# EAGLE board Steering (EAGLE 9.5.1)
AUTHORS: Austin Keener; REV: 1.0; TITLE: LIDAR_BREAKOUT
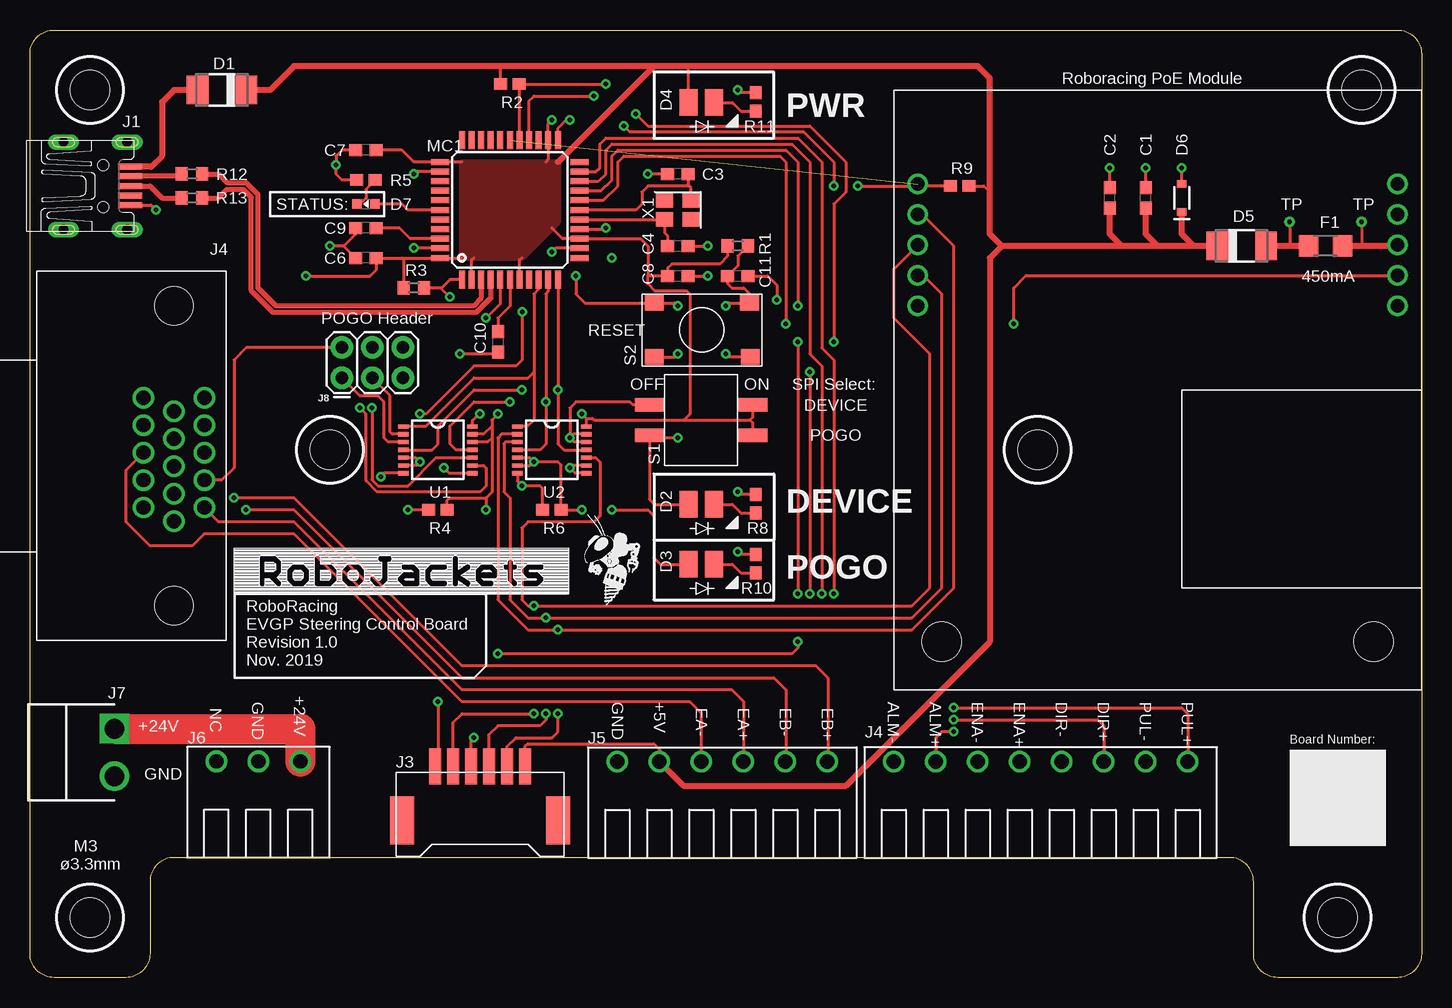
[diagram p0: board, top side]
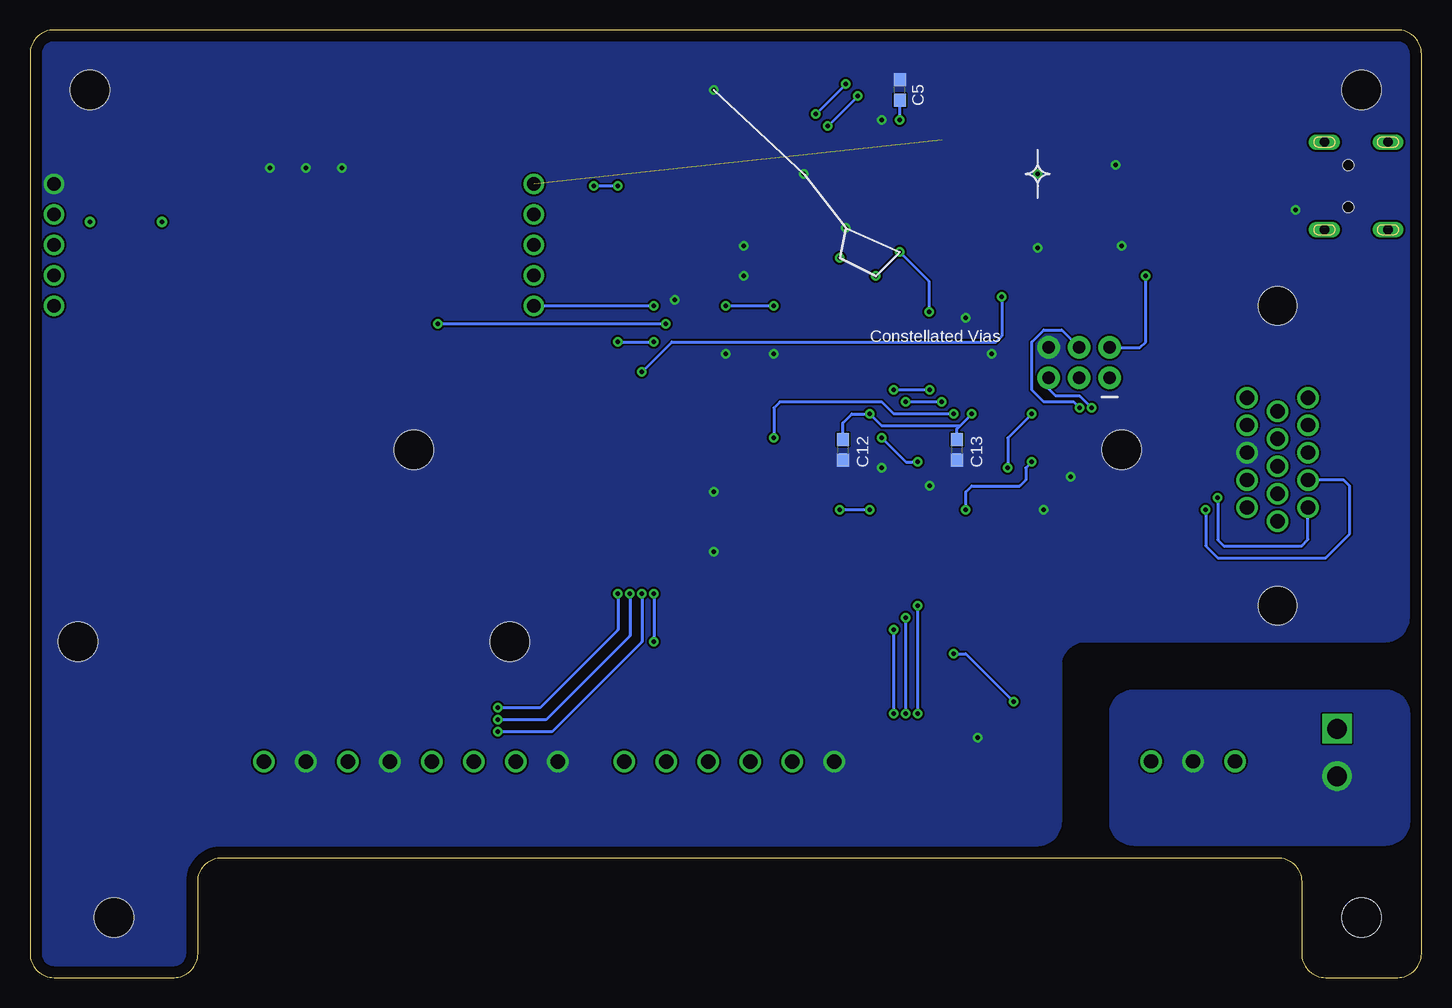
[diagram p1: board, bottom side, seen from below]

Size 116 x 79 mm. Coordinates in mm from the lower left corner, seen from the top.
Outline: 12,10 arc90 10,8 10,2 arc-90 8,0 2,0 arc-90 0,2 0,77 arc-90 2,79 114,79 arc-90 116,77 116,2 arc-90 114,0 104,0 arc-90 102,2 102,8 arc90 100,10 12,10
Copper layers (1*16): Top 0.0356mm / dielectric 63mil / Bottom 0.0356mm
Design rules "RJ2LayerDRU *": minimum track width 6mil, minimum drill 15mil, track to track 6mil, track to pad 6mil, pad to pad 6mil, via to via 6mil, smd to smd 6mil, copper to edge 0mil, drill to drill 6mil, minimum pad ring 10mil, minimum via ring 8mil, stop-mask expansion 4mil, vias tented up to drill 0mil, thermal gap 0mil
Net classes: 0 default: width 0.203 mm; 2 diff: width 0.406 mm
Holes 3.3 mm at 5,5 109,5 111,74 25,44 84,44 5,74

## Footprints (pad centres in the part's own frame; a part is rotated, then mirrored left to right if it is on the bottom)
C0603 = smd 1.1 x 1: 1 -0.85,0; 2 0.85,0
DO-214AC = smd 1.8 x 2.4: A 2.025,0; C -2.025,0
KINGBRIGHT_LED = smd 1.5 x 2.2: P$1 -1.016,0.048; P$2 1.084,0.048
SOD-323 = smd 0.63 x 0.83: A 1.15,0; C -1.15,0
CHIP-LED0603 = smd 0.8 x 0.8: A 0,-0.75; C 0,0.75
F1206 = smd 1.6 x 1.803: 1 -1.422,0; 2 1.422,0
UX60-MB-5S8 = smd 2 x 0.5: 1 8.65,1.6; 2 8.65,0.8; 3 8.65,0; 4 8.65,-0.8; 5 8.65,-1.6 | drill 0.8 long: M1 3.1,-3.65; M2 3.1,3.65; M3 8.4,3.65; M4 8.4,-3.65 | hole 0.9: 6.4,-1.75; 6.4,1.75
MOLEX_5025850670 = smd 1 x 3: 1 3.75,3.5; 2 2.25,3.5; 3 0.75,3.5; 4 -0.75,3.5; 5 -2.25,3.5; 6 -3.75,3.5 | smd 2 x 4: 7 6.5,-1; 8 -6.5,-1
SCREW_TERMINAL_PCB_CONN_8_POLE = drill 1.2: 1 0,0; 2 3.5,0; 3 7,0; 4 10.5,0; 5 14,0; 6 17.5,0; 7 21,0; 8 24.5,0
SCREW_TERMINAL_PCB_CONN_6_POLE = drill 1.2: 1 0,0; 2 3.5,0; 3 7,0; 4 10.5,0; 5 14,0; 6 17.5,0
SCREW_TERMINAL_PCB_CONN_3_POLE = drill 1.2: 1 -3.5,0; 2 0,0; 3 3.5,0
B2PS-CENTERED = drill 1.65 square: 1 -1.98,0 | drill 1.65: 2 1.98,0
2X3 = drill 1.016 pad 1.88: 1 0,0; 2 0,2.54; 3 2.54,0; 4 2.54,2.54; 5 5.08,0; 6 5.08,2.54
TE_VGA_2311586-5 = drill 1.19: 1 -8.185,2.54; 2 -10.475,2.54; 3 -12.765,2.54; 4 -15.055,2.54; 5 -17.345,2.54; 6 -7.04,0; 7 -9.33,0; 8 -11.62,0; 9 -13.91,0; 10 -16.2,0; 11 -8.185,-2.54; 12 -10.475,-2.54; 13 -12.765,-2.54; 14 -15.055,-2.54; 15 -17.345,-2.54 | hole 3.18: 0,0; -25,0
TQFP44 = smd 1.5 x 0.5: 1 -5.8,4; 2 -5.8,3.2; 3 -5.8,2.4; 4 -5.8,1.6; 5 -5.8,0.8; 6 -5.8,0; 7 -5.8,-0.8; 8 -5.8,-1.6; 9 -5.8,-2.4; 10 -5.8,-3.2; 11 -5.8,-4; 23 5.8,-4; 24 5.8,-3.2; 25 5.8,-2.4; 26 5.8,-1.6; 27 5.8,-0.8; 28 5.8,0; 29 5.8,0.8; 30 5.8,1.6; 31 5.8,2.4; 32 5.8,3.2; 33 5.8,4 | smd 0.5 x 1.5: 12 -4,-5.8; 13 -3.2,-5.8; 14 -2.4,-5.8; 15 -1.6,-5.8; 16 -0.8,-5.8; 17 0,-5.8; 18 0.8,-5.8; 19 1.6,-5.8; 20 2.4,-5.8; 21 3.2,-5.8; 22 4,-5.8; 34 4,5.8; 35 3.2,5.8; 36 2.4,5.8; 37 1.6,5.8; 38 0.8,5.8; 39 0,5.8; 40 -0.8,5.8; 41 -1.6,5.8; 42 -2.4,5.8; 43 -3.2,5.8; 44 -4,5.8
R0603 = smd 1 x 1.1: 1 -0.85,0; 2 0.85,0
R0603W = smd 1.09 x 0.94: 1 -0.775,0; 2 0.775,0
PTS645 = smd 1.55 x 1.3: P$1 -3.975,2.25; P$2 3.975,2.25; P$3 -3.975,-2.25; P$4 4.025,-2.25
CTS_DIP_SWITCH = smd 1.118 x 2.438: A1 -1.25,-4.361; A2 -1.25,4.25; B1 1.29,-4.361; B2 1.29,4.25
TP_15TH = drill 0.381 pad 0.61: P$1 0,0
TSSOP14 = smd 0.9 x 0.35: 1 -2.875,1.95; 2 -2.875,1.3; 3 -2.875,0.65; 4 -2.875,0; 5 -2.875,-0.65; 6 -2.875,-1.3; 7 -2.875,-1.95; 8 2.875,-1.95; 9 2.875,-1.3; 10 2.875,-0.65; 11 2.875,0; 12 2.875,0.65; 13 2.875,1.3; 14 2.875,1.95
HDRVR10W64P4000X254_2X5_1016X508X254B = drill 1.105 pad 1.705: 1 2,18; 2 2,15.46; 3 2,12.92; 4 2,10.38; 5 2,7.84; 6 42,7.84; 7 42,10.38; 8 42,12.92; 9 42,15.46; 10 42,18 | hole 3.3: 4,46; 40,46
XTAL-3.2X2.5 = smd 1.4 x 1.2: 1 -1.1,-0.8; 2 1.1,-0.8; 3 1.1,0.8; 4 -1.1,0.8

## Placement (x,y rotation side)
C1  0.1 uF  [C0603]  93,65 90 top
C2  1 uF  [C0603]  90,65 90 top
C3  9 pF  [C0603]  54,67 180 top
C4  9 pF  [C0603]  54,61 0 top
C5  0.1 uF  [C0603]  43.5,74 90 bottom
C6  0.1 uF  [C0603]  28,60 180 top
C7  0.1 uF  [C0603]  28,69 180 top
C8  0.1 uF  [C0603]  54,58.5 0 top
C9  10 nF  [C0603]  28,62.5 180 top
C10  1 uF  [C0603]  39,53 270 top
C11  0.1 uF  [C0603]  59,58.5 0 top
C12  0.1 uF  [C0603]  48.25,44 270 bottom
C13  0.1 uF  [C0603]  38.75,44 270 bottom
D1  APD340VRTR-G1  [DO-214AC]  16,74 180 top
D2  LED_AA3528VRVCS/A  [KINGBRIGHT_LED]  56,39.5 180 top
D3  LED_AA3528VRVCS/A  [KINGBRIGHT_LED]  56,34.5 180 top
D4  PINK  [KINGBRIGHT_LED]  56,73 180 top
D5  APD340VRTR-G1  [DO-214AC]  101,61 0 top
D6  5.1V  [SOD-323]  96,65 90 top
D7  BLUE  [CHIP-LED0603]  28,64.5 90 top
F1  FUSE1206  [F1206]  108,61 0 top
J1  UX60-MB-5S8  [UX60-MB-5S8]  -0.3,66 0 top
J2  MOLEX_5025850670  [MOLEX_5025850670]  37.54,14.12 0 top
J4  PCB_SCREW_TERM_8  [SCREW_TERMINAL_PCB_CONN_8_POLE]  72,18 0 top
J5  PCB_SCREW_TERM_6  [SCREW_TERMINAL_PCB_CONN_6_POLE]  48.96,18 0 top
J6  PCB_SCREW_TERM_3  [SCREW_TERMINAL_PCB_CONN_3_POLE]  19.04,18.02 0 top
J7  B2PS-VH(LF)(SN)  [B2PS-CENTERED]  7.04,18.76 270 top
J8  AVR_SPI_PROG_3X2PTH  [2X3]  26,50 0 top
J9  TE_2311586-5_VGA_CONNECTOR  [TE_VGA_2311586-5]  12,31 270 top
MC1  ATMEGA32U4-AU  [TQFP44]  40,64 90 top
R1  10 KΩ  [R0603]  59,61 0 top
R2  10KΩ  [R0603W]  40,74.5 180 top
R3  10 KΩ  [R0603]  32,57.5 180 top
R4  10KΩ  [R0603W]  34,39 0 top
R5  200Ω  [R0603W]  28,66.5 180 top
R6  10KΩ  [R0603W]  43.5,39 0 top
R8  100Ω  [R0603W]  60.5,39.5 270 top
R9  10KΩ  [R0603W]  77.5,66 0 top
R10  100Ω  [R0603W]  60.5,34.5 270 top
R11  100Ω  [R0603W]  60.5,73 270 top
R12  22 Ω  [R0603]  13.5,67 180 top
R13  22 Ω  [R0603]  13.5,65 180 top
RESET_BUTTON  PTS645  [PTS645]  56,54 0 top
S1  CTS_SWITCH_SPST  [CTS_DIP_SWITCH]  56,46.5 270 top
TP1  TEST-POINTTP_15TH_THRU  [TP_15TH]  105,63 0 top
TP2  TEST-POINTTP_15TH_THRU  [TP_15TH]  111,63 0 top
U1  CD4066BPWR  [TSSOP14]  34,44 0 top
U2  CD4066BPWR  [TSSOP14]  43.5,44 0 top
U3  ETH-POE  [HDRVR10W64P4000X254_2X5_1016X508X254B]  116,74 180 top
U$4  [ROBOJACKETS]  17,32 0 top
U$5  [ROBOBUZZ_0.4X]  48,31 0 top
X1  TSX-3225 16.0000MF18X-AC0  [XTAL-3.2X2.5]  54,64 180 top

## Library data of the parts
C1-C13 = resistor
D1 D5 = RoboJackets-Diodes
D2-D4 = Steering; DKPN: 754-1534-1-ND
D6 = SparkFun-DiscreteSemi; PROD_ID: DIO-11284
D7 = RoboJackets-LEDs; DIGIKEY: 160-1647-1-ND; MPN: LTST-C191TBKT
F1 = RoboJackets-Passive
J1 = RoboJackets-Connectors; PINS: 5
J2 = Steering
J4 = Steering; DKPT: 732-2774-ND
J5 = Steering; DKPT: 732-2773-ND
J6 = Steering; DKPT: 732-2770-ND
J7 = RoboJackets-Connectors; DIGIKEY: 455-1648-ND; MPN: B2PS-VH(LF)(SN)
J8 TP1 TP2 = SparkFun-Connectors
J9 = Steering; DKPN: A144832-ND
MC1 = adafruit
R1 R3 R12 R13 = rcl; SPICEPREFIX: R
R2 R4-R6 R8-R11 = RoboJackets-Resistors
RESET_BUTTON = RoboJackets-Switches
S1 = Steering; DKPT: CT3113CT-ND
U1 U2 = Steering; DKPN: 296-14123-1-ND
U3 = ethernet_poe
U$4 U$5 = RoboJackets-Aesthetics
X1 = RoboJackets-FreqGen

## Nets
5V_MC: C1.1 C2.1 C5.1 C6.1 C7.1 C8.1 C12.1 C13.1 D1.C D4.P$2 D5.C D6.C J2.1 J5.2 J8.2 J9.2 MC1.2 MC1.7 MC1.14 MC1.24 MC1.34 MC1.44 R1.1 R2.2 R3.2 R9.2 S1.A2 S1.B2 U1.14 U2.14
+24V_STEPPER: J6.3 J7.1
AREF: C9.1 MC1.42
CS_ENCODER: J2.6 MC1.27 R2.1
CS_ETH: MC1.26
DATA_N [diff]: MC1.3 R12.1
DATA_P [diff]: MC1.4 R13.1
DEVICE_SWITCH: D3.P$2 R6.2 S1.A1 U2.5 U2.6 U2.12 U2.13
DIR+: J4.6 MC1.20
EA+: J5.4 J9.1
EA-: J5.3 J9.13
EB+: J5.6 J9.11
EB-: J5.5 J9.12
ETH_INT: MC1.19 U3.10
GND: C1.2 C2.2 C3.2 C4.2 C5.2 C6.2 C7.2 C8.2 C9.2 C10.2 C11.2 C12.2 C13.2 D6.A J1.5 J2.4 J4.1 J4.5 J4.7 J5.1 J8.6 J9.3 MC1.5 MC1.15 MC1.23 MC1.35 MC1.43 R4.1 R5.2 R6.1 R8.1 R10.1 R11.1 RESET_BUTTON.P$3 RESET_BUTTON.P$4 U1.7 U2.7 U2.8 U2.9 U3.5
GND_STEPPER: J6.2 J7.2
MISO: MC1.11 U1.4 U2.11
MISO_DEVICE: J2.5 U2.10 U3.8
MISO_POGO: J8.1 U1.3
MOSI: MC1.10 U1.11 U2.4
MOSI_DEVICE: J2.3 U2.3 U3.9
MOSI_POGO: J8.4 U1.10
N$1: D1.A J1.1
N$2: D7.A MC1.39
N$3: D7.C R5.1
N$4: D3.P$1 R10.2
N$6: D2.P$1 R8.2
N$8: J1.2 R12.2
N$9: F1.2 TP2.P$1 U3.3
N$10: D4.P$1 R11.2
N$12: D5.A F1.1 TP1.P$1
N$23: J1.3 R13.2
POGO_SWITCH: D2.P$2 R4.2 S1.B1 U1.5 U1.6 U1.12 U1.13
PUL+: J4.8 MC1.21
RST_MC: C11.1 MC1.13 R1.2 RESET_BUTTON.P$1 RESET_BUTTON.P$2 U1.8
RST_MC_POGO: J8.5 U1.9
RST_NET: MC1.18 U3.2
SCLK: MC1.9 U1.1 U2.1
SCLK_DEVICE: J2.2 U2.2 U3.7
SCLK_POGO: J8.3 U1.2
SCNN: MC1.28 R9.1 U3.6
STEPPER_ALARM: J4.2 MC1.1 R3.1
UCAP: C10.1 MC1.6
XTAL1: C3.1 MC1.17 X1.1
XTAL2: C4.1 MC1.16 X1.3

## Tracks (layer width: path | path; a pad name or v marks a point on that pad's centre or on a via)
5V_MC  (via drill 0.38)
  Top 0.254: 31,60 C6.1 28.85,59 28.35,58.5 v23,58.5 | 31,60 MC1.44 36,60 | R9.2 79.5,66 80,65.5 | 43,68 43.2,68.2 MC1.24 43.2,71.2 v43.5,71.5 | 43.5,62.5 44.4,61.6 MC1.14 50.9,61.6 51.5,61 51.5,58.5 | MC1.7 40.8,59.8 41,60 | MC1.2 36.8,59.8 37,60 | 36,68 MC1.34 32,68 31,69 C7.1 | J2.1 41.29,19.29 41.5,19.5 52,19.5 52.46,19.04 J5.2 | 51.5,58.5 C8.1 53.15,59.15 53.5,59.5 57.5,59.5 58.15,60.15 R1.1 | U1.14 36.88,46.45 37.42,47 v37.5,47 | v46,47 46.38,46.62 | U2.14 46.38,46.62 | 46.38,46.62 46.88,46.62 47,46.5 54.5,46.5 | 54.5,46.5 60,46.5 | S1.A2 60.25,46.75 60,46.5 | S1.B2 60.25,46.25 60,46.5 | 51.5,58.5 51.5,57.85 52.1,57.25 54.75,57.25 55,57 55,47 54.5,46.5 | D4.P$2 54.92,75.92 55,76 | 31,60 31.15,59.85 R3.2 | R2.2 39.23,75.72 39.5,76 | J8.2 18.04,52.54 17,51.5 17,42.5 15.97,41.48 J9.2
  Top 0.508: 97,61 94,61 | 94,61 93,62 C1.1 | 91,61 90,62 C2.1 | 81,61 80,62 80,65.5 80,75 79,76 55,76 52,76 | 52,76 39.5,76 22,76 20,74 D1.C | 94,61 91,61 | 91,61 81,61 | 97,61 96,62 D6.C | 52,76 44,68 | 81,61 80,60 80,28 68,16 54.46,16 J5.2 | D5.C 97,61
  Bottom 0.254: v23,58.5 23,53 23.46,52.54 J8.2 | v37.5,47 38.5,46 | 38.5,46 45,46 v46,47 47.5,47 48.25,46.25 C12.1 | C13.1 38.75,45.75 38.5,46 | v43.5,71.5 C5.1
  pour Top: 36,68 44,68 44,63 41,60 36,60
+24V_STEPPER
  Top 2.5: J7.1 22.54,20.74 J6.3
AREF
  Top 0.254: MC1.42 31.7,61.6 30.8,62.5 C9.1
CS_ENCODER  (via drill 0.38)
  Top 0.254: v50.5,72 51.5,71 65,71 68,68 68,65.5 67,64.5 v67,53 | v64,53 v64,32 | v64,28 64,27.5 63.5,27 v39,27 | v34,23 34,17.83 J2.6 | MC1.27 40.8,74.47 R2.1 v48,74.5
  Bottom 0.254: v48,74.5 v50.5,72 | v67,53 v64,53 | v64,32 v64,28 | v39,27 38,27 v34,23
CS_ETH  (via drill 0.38)
  Top 0.254: v49.5,71 50,70.5 64.5,70.5 67,68 v67,66 | v69,66 73.84,66 | MC1.26 41.6,73.1 42,73.5 v47,73.5
  Bottom 0.254: v47,73.5 v49.5,71 | v67,66 v69,66
DATA_N
  Top 0.406: MC1.3 37.6,56.64 36.96,56 20.5,56 19,57.5 19,65.29 18.89,65.39 18.64,65.64 18.01,66.28 16.43,66.28 15.71,67 R12.1
DATA_P
  Top 0.406: MC1.4 38.4,56.64 37.2,55.44 20.27,55.44 18.44,57.27 18.44,65.06 18.25,65.25 17.78,65.72 16.43,65.72 15.71,65 R13.1
DEVICE_SWITCH  (via drill 0.38)
  Top 0.254: U2.13 45.3,45.3 v45,45 | U2.12 45.35,44.65 v45,45 | U2.5 41.65,43.35 v42,43 | v42,43 44,43 44.27,42.73 R6.2 v46,39 | S1.A1 50.25,47.75 50,48 45.5,48 45,47.5 v45,45 | D3.P$2 52.55,34.45 52,35 52,38.5 51.5,39 v48.5,39 | U2.6 41.7,42.7 v42,43
  Bottom 0.254: v45,45 43,43 v42,43 | v46,39 v48.5,39
DIR+  (via drill 0.38)
  Top 0.254: MC1.20 47.4,66.4 48,67 48,69 48.5,69.5 63.5,69.5 65,68 65,52 66,51 v66,32 | v77,21.5 89,21.5 89.5,21 J4.6
  Bottom 0.254: v66,32 66,28.5 73,21.5 v77,21.5
EA+
  Top 0.254: J5.4 59.5,18.04 59.5,23 58.5,24 36,24 22,38 15.72,38 J9.1
EA-
  Top 0.254: J5.3 55.96,22.04 55,23 36,23 22,37 14.5,37 13.5,36 10,36 8,38 8,42.3 J9.13
EB+  (via drill 0.38)
  Top 0.254: J5.6 66.5,18.04 66.5,25 65.5,26 36,26 22,40 v17,40
  Bottom 0.254: v17,40 17,36.5 16.5,36 10,36 9.46,36.54 J9.11
EB-  (via drill 0.38)
  Top 0.254: J5.5 63,18.04 63,24 62,25 36,25 22,39 v18,39
  Bottom 0.254: v18,39 18,36 17,35 8,35 6,37 6,41 6.5,41.5 9.44,41.5 J9.12
ETH_INT  (via drill 0.38)
  Top 0.254: MC1.19 47.6,65.6 48.5,66.5 48.5,68.5 49,69 63,69 64,68 v64,56
  Bottom 0.254: v64,56 U3.10
GND  (via drill 0.38)
  Top 0.254: C4.2 v56.5,61 | C3.2 v51.5,67 | 31.07,42 U1.7 29.55,42.05 v29.25,41.75 | U2.7 40.62,41.38 v41,41 42.5,41 42.73,40.77 R6.1 | R4.1 v31.5,39 | J2.4 36.79,19.79 v37,20 | D6.A v96,67.5 | 93.3,66.15 C1.2 v93,67.5 | C2.2 v90,67.5 | J1.5 10.1,64.4 v10.5,64 | RESET_BUTTON.P$3 53.75,51.75 v54,52 | RESET_BUTTON.P$4 58.25,51.75 v58,52 | 60.25,58.5 C11.2 61.5,58.5 62.25,57.75 v62.25,56.5 | C8.2 v56.5,58.5 | MC1.43 32.03,60.8 v32,60.83 | MC1.5 39.2,56.16 v38,55 | C10.2 38.85,52 v35.83,52 | MC1.23 44,70.8 44.7,71.5 v45,71.5 | MC1.35 32.2,67.2 v32,67 | MC1.15 47.9,62.4 v48,62.5 | R10.1 59.23,35.27 v59,35.5 | R8.1 59.23,40.27 v59,40.5 | R11.1 59.23,73.78 v59,74 | 46.33,42 U2.8 45.45,42.05 v45,42.5 45.2,42.7 U2.9 | C6.2 26.15,61 | 26.15,61 v25,61 | C9.2 27.15,62 26.15,61 | C7.2 26,69 25.5,68.5 v25.5,67.75 25.5,67 26,66.5 R5.2
  pour Bottom (no thermals): 1,77 arc-90 2,78 114,78 arc-90 115,77 115,2 arc-90 114,1 104,1 arc-90 103,2 103,8 arc90 100,11 32,11 arc-90 30,13 30,26 arc90 28,28 3,28 arc-90 1,30
GND_STEPPER
  pour Bottom (no thermals): 26,13 26,22 arc90 24,24 3,24 arc90 1,22 1,13 arc90 3,11 24,11 arc90
MISO  (via drill 0.38)
  Top 0.254: MC1.11 v44,49 44,44.5 44.5,44 U2.11 | U1.4 33.5,44 34,44.5 34,46 37,49 v41,49
  Bottom 0.254: v41,49 v44,49
MISO_DEVICE  (via drill 0.38)
  Top 0.254: U2.10 47.15,43.35 47.5,43 47.5,38.5 47,38 41.5,38 41,37.5 41,31.5 41.5,31 v42,31 73.5,31 75,32.5 75,52 72,55 72,59.08 U3.8 | J2.5 35.29,21.29 36,22 v42,22
  Bottom 0.254: v42,22 v42,31
MISO_POGO
  Top 0.254: U1.3 29.85,44.65 29.5,45 29.5,48 29,48.5 27.5,48.5 J8.1
MOSI  (via drill 0.38)
  Top 0.254: MC1.10 43.2,57.2 43,57 v43,48 43,44.5 42.5,44 U2.4 | U1.11 35.5,44 35,44.5 35,46 37,48 v40,48
  Bottom 0.254: v40,48 v43,48
MOSI_DEVICE  (via drill 0.38)
  Top 0.254: U2.3 39.65,44.65 39.5,44.5 39.5,40.5 40,40 40,31.5 41.5,30 v43,30 73.5,30 76,32.5 76,57 74.46,58.54 U3.9 | J2.3 38.29,20.29 39,21 42.5,21 43,21.5 v43,22
  Bottom 0.254: v43,22 v43,30
MOSI_POGO  (via drill 0.38)
  Top 0.254: v28.5,47.5 28.5,41.5 29,41 31.5,41 33.85,43.35 U1.10
  Bottom 0.254: v28.5,47.5 29,48 31.5,48 32.5,49 32.5,53 31.5,54 30,54 J8.4
N$1
  Top 0.508: D1.A 12,74 11,73 11,68.5 10.1,67.6 J1.1
N$2
  Top 0.254: MC1.39 31.5,64 31,64.5 D7.A
N$3
  Top 0.254: R5.1 28,65.72 28,65 27.5,64.5 D7.C
N$4
  Top 0.254: D3.P$1 58.55,34.45 59.27,33.73 R10.2
N$5  (via drill 0.38)
  other vias: 48.5,60
N$6
  Top 0.254: D2.P$1 58.55,39.45 59.27,38.73 R8.2
N$8
  Top 0.406: R12.2 12.45,66.8 J1.2
N$9
  Top 0.254: TP2.P$1 111,61
  Top 0.508: U3.3 113.92,61 111,61 F1.2
N$10
  Top 0.254: D4.P$1 58.55,72.95 59.27,72.22 R11.2
N$12
  Top 0.254: TP1.P$1 105,61
  Top 0.508: F1.1 105,61 D5.A
N$23
  Top 0.406: J1.3 10,66 11,65 R13.2
POGO_SWITCH  (via drill 0.38)
  Top 0.254: v39,47 38.5,46.5 38.5,46 | U1.5 32.15,43.35 v32.5,43 32.2,42.7 U1.6 | 38,40 38.5,40.5 38.5,45 | 38.5,46 38.5,45 | R4.2 34.77,39.77 35,40 38,40 | D2.P$2 52.05,39.45 51.64,39.86 S1.B1 51.85,45 v54,45 | 38,40 v38,39 | 38.5,45 38.15,44.65 U1.12 | 38.5,46 37.8,45.3 U1.13
  Bottom 0.254: v39,47 44,47 45,48 53.5,48 54,47.5 v54,45 | v32.5,43 33,42.5 33,41.5 33.5,41 37.5,41 38,40.5 v38,39
PUL+  (via drill 0.38)
  Top 0.254: v77,22.5 96,22.5 96.5,22 J4.8 | MC1.21 47.2,67.2 47.5,67.5 47.5,69.5 48,70 64,70 66,68 66,52.5 67,51.5 v67,32
  Bottom 0.254: v67,32 67,29 73.5,22.5 v77,22.5
RST_MC  (via drill 0.38)
  Top 0.254: MC1.13 43.8,60.8 v43.5,60.5 | v41.05,55.5 41,55.45 41,51.5 40.5,51 37,51 33,47 v32.5,47 | v34.5,42.5 34.95,42.05 U1.8 | v45.5,58.5 45.5,57 46.25,56.25 RESET_BUTTON.P$1 53.75,56.25 v54,56 | R1.2 59,60.15 59,59.35 C11.1 58.15,57.85 58.5,57.5 59.5,57.5 59.98,57.02 RESET_BUTTON.P$2 58.25,56.25 v58,56
  Bottom 0.254: v41.05,55.5 41.05,58.05 v43.5,60.5 v45.5,58.5 | v32.5,47 34.5,45 v34.5,42.5 | v54,56 v58,56
RST_MC_POGO  (via drill 0.38)
  Top 0.254: U1.9 37.8,42.7 38,42.5 38,41 37.5,40.5 28.93,40.5 28,41.42 28,47 v27.5,47.5
  Bottom 0.254: v27.5,47.5 28.5,48.5 30.5,48.5 31.08,49.08 J8.5
RST_NET  (via drill 0.38)
  Top 0.254: MC1.18 47.8,64.8 49,66 49,68 49.5,68.5 62.5,68.5 63,68 v63,54.5 | U3.2 83.04,58.54 82,57.5 v82,54.5
  Bottom 0.254: v63,54.5 v82,54.5
SCLK
  Top 0.254: MC1.9 42.4,57.4 42,57 42,50.5 | 42,50.5 42,46.5 41.45,45.95 U2.1 | U1.1 31.18,46 33,46 37,50 41.5,50 42,50.5
SCLK_DEVICE  (via drill 0.38)
  Top 0.254: U2.2 39.3,45.3 39,45 39,31.5 41.5,29 v44,29 73.5,29 77,32.5 77,61 74.38,63.62 U3.7 | J2.2 39.79,19.29 40.5,20 43.5,20 44,20.5 v44,22
  Bottom 0.254: v44,22 v44,29
SCLK_POGO
  Top 0.254: U1.2 30.2,45.3 30,45.5 30,48.5 28.54,49.96 J8.3
SCNN  (1 unrouted)
  Top 0.254: U3.6 74.16,66 R9.1
STEPPER_ALARM  (via drill 0.38)
  Top 0.254: MC1.1 35,58.2 34.3,57.5 34.25,57.5 | 34.25,57.5 R3.1 | 34.25,57.5 v35,56.75 | v77,20.5 76,20.5 75.5,20 J4.2 | v65,50.5 v65,32
  Bottom 0.254: v35,56.75 35,53.5 35.5,53 62.5,53 v65,50.5 | v65,32 65,28 72.5,20.5 v77,20.5
UCAP
  Top 0.254: MC1.6 40,56 39,55 C10.1
XTAL1
  Top 0.254: C3.1 54.85,66.15 55,66 | X1.1 55.1,65.9 55,66 | 55,66 51.5,66 51,65.5 51,64.5 50.5,64 MC1.17
XTAL2
  Top 0.254: X1.3 52.9,63 | 52.9,63 52.9,62.1 53.15,61.85 C4.1 | MC1.16 52.7,63.2 52.9,63

## Text on the board
tPlace: Board Number:
tNames: Roboracing PoE Module | PWR | STATUS: | TP | TP | J4 | 450mA | POGO Header | RESET | S2 | OFF | ON | SPI Select: | DEVICE | POGO | S1 | DEVICE | POGO | RoboRacing / EVGP Steering Control Board / Revision 1.0 / Nov. 2019 | +24V | GND | GND | +5V | ALM- | ALM+ | ENA- | ENA+ | DIR- | DIR+ | PUL- | PUL+ | NC | EA- | EA+ | EB- | EB+ | +24V | J3 | GND | M3 / ø3.3mm
bNames: Constellated Vias
tDocu: For constellation